# Altium PCB SPACER_1.PcbDoc
Units mm, origin at the board's own origin, x right, y up, seen from the top; angles counter-clockwise.
Board outline 22 x 22 mm, 2 copper layers (Top Layer, Bottom Layer), stack 1.571 mm thick; 1 components, 4 nets, 22 pads, 0 vias.
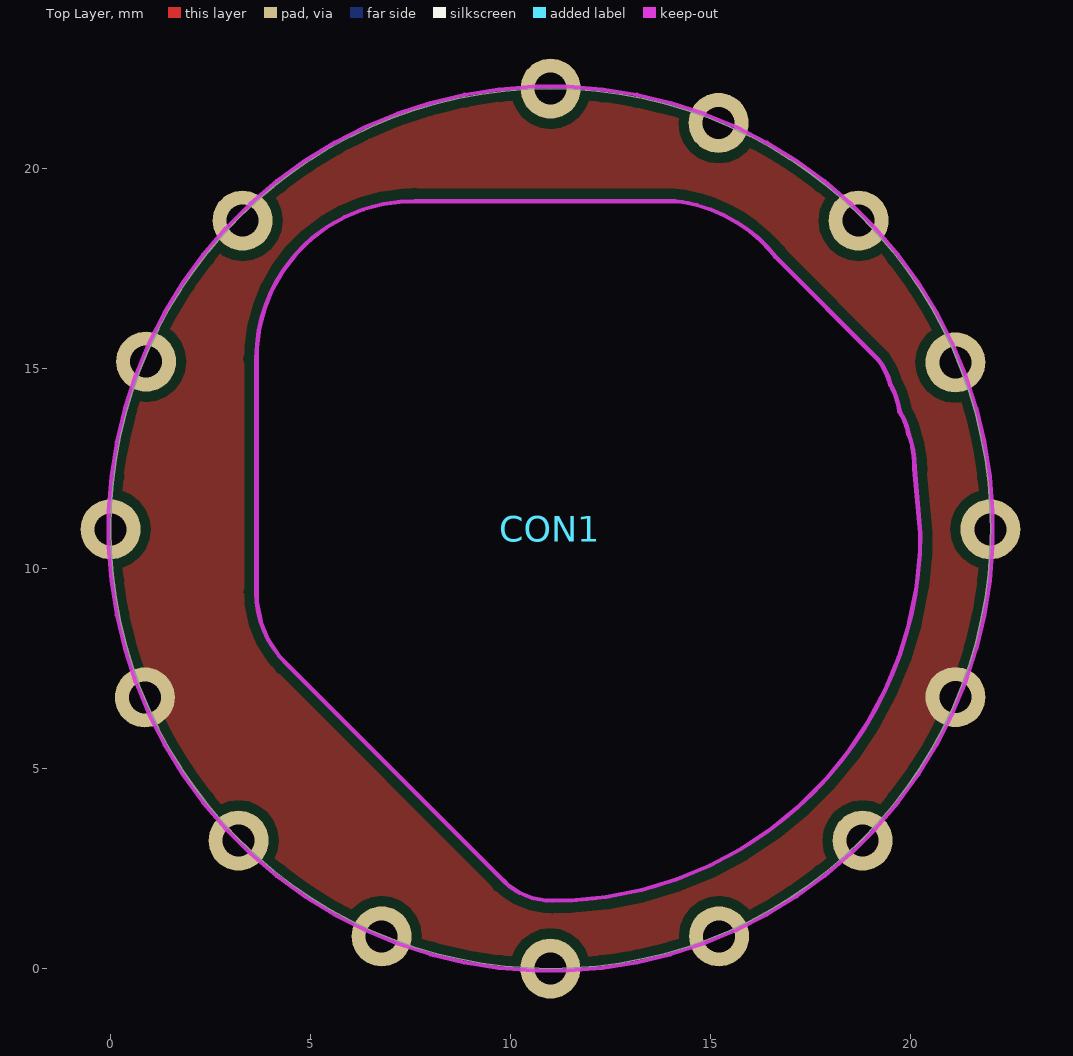
[diagram p0: Top Layer view]
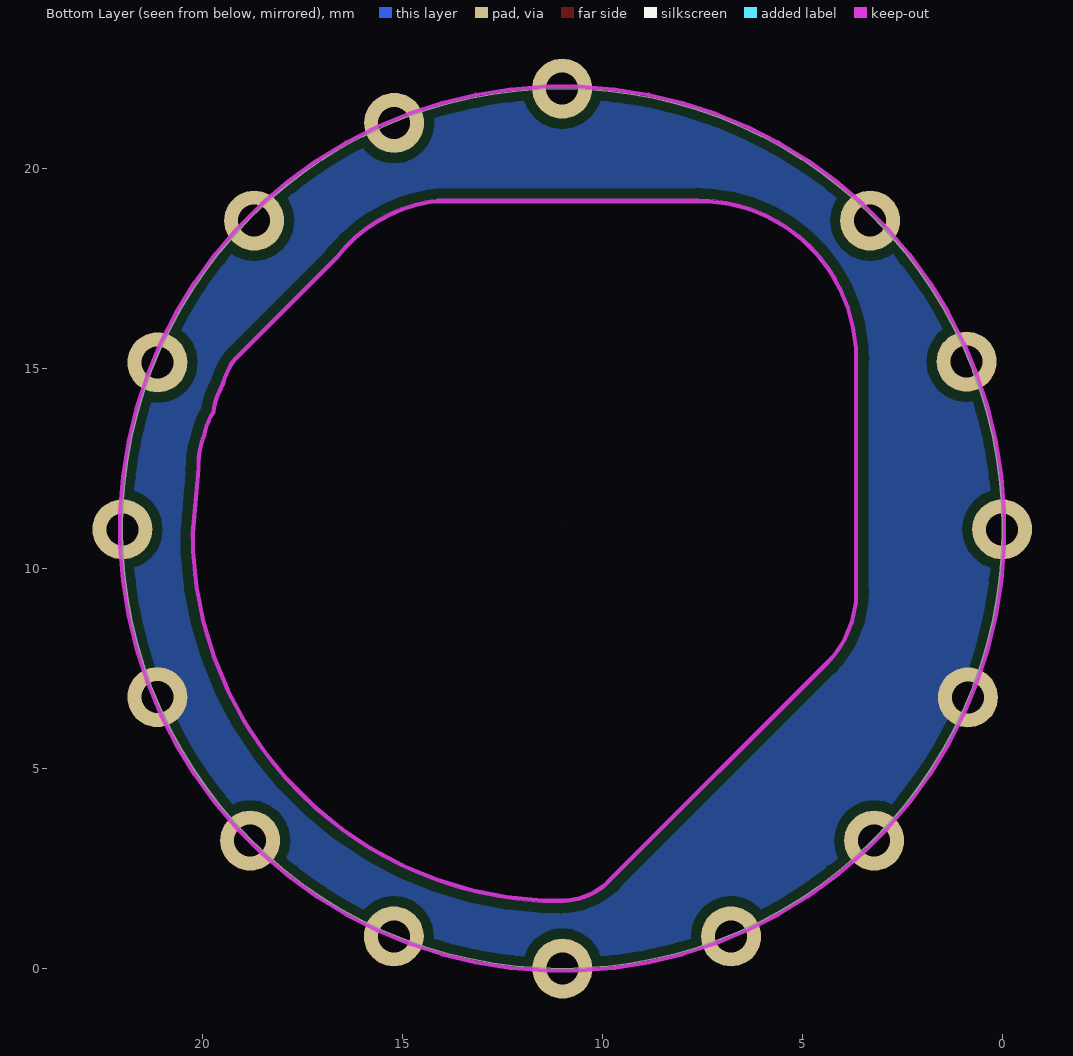
[diagram p1: Bottom Layer view, seen from below]

## Layer stack, top to bottom
Top Solder: solder mask 0.0102, Solder Resist, Dk 3.5
Top Layer: signal copper 0.0356
Dielectric 1: dielectric 1.5, FR-4, Dk 4.8
Bottom Layer: signal copper 0.0356
Bottom Solder: solder mask 0.0102, Solder Resist, Dk 3.5

## Board outline
11,0 cw(c11,11) 0,11 cw(c11,11) 11,22 cw(c11,11) 22,11 cw(c11,11)
cut-out: 11.041,1.65 cw(c11.04,3.414) 9.793,2.167 4.354,7.606 cw(c6.15,9.402) 3.61,9.402 3.61,15.256 cw(c7.585,15.258) 7.587,19.233 14.127,19.233 cw(c13.693,15.48) 16.654,17.826 19.216,15.264 cw(c17.756,14.153) 19.53,14.62 cw(c17.918,13.686) 19.765,13.931 cw(c18.536,13.113) 19.99,13.37 cw(c18.008,12.589) 20.137,12.51 20.28,10.889 cw(c11.041,10.889)
cut-out: 10.98,11.02

## Design rules (kind name [scope] priority, off if disabled: settings)
Clearance [All] p1: gap=0.254 ignorepadtopadclearanceinfootprint=FALSE except(0: Arc-Hole Track-Hole SMDPad-Hole THPad-Hole Via-Hole Fill-Hole Poly-Hole Region-Hole Text-Hole)
PolygonConnect [All] p1: connectstyle=Direct reliefconductorwidth=0.254 reliefentries=4 polygonreliefangle="90 Angle" airgapwidth=0.254
RoutingVias [All] p1: holewidth=0.711 width=1.27 viastyle="Through Hole" minholewidth=0.711 minwidth=1.27 maxholewidth=0.711 maxwidth=1.27
SolderMaskExpansion [All] p1: expansion=0.102
Width [All] p1: maxlimit=0.254 minlimit=0.254 preferedwidth=0.254
30 further rules are at their usual default settings.

## Components (designator, comment, footprint, x,y, rotation, side; value= is the part's Value field where it differs from the comment)
CON1 "Between PCB connection" SmartParks_Rhino 11,11 r0 top locked

## Footprints (in the part's own frame and the unit in brackets; to place one, negate y for a bottom-side part, rotate by r counter-clockwise, add the part's x,y. Pads: shape width x height; smd on the part's side, far side on the other; paste and mask are expansions set on the pad)
SmartParks_Rhino [mm]
  round 1.5 hole 0.8: 1(0,11) 2(4.199,10.142) 3(7.7,7.7) 4(10.119,4.153) 5(10.993,-0.017) 6(10.122,-4.212) 7(7.8,-7.8) 8(4.211,-10.193) 9(-0.007,-11) 10(-4.222,-10.197) 11(-7.8,-7.8) 12(-10.143,-4.22) 13(-11,-0.017) 14(-10.11,4.176) 15(-7.7,7.7)

## Part data
CON1: library part SmartParks_Rhino

## Free pads (board coordinates)
  round 0.25 hole 0.8 unplated: 16(4.04,1.5) 16(4.967,0.9) 16(5.047,21.097) 16(22.37,7.99) 16(22.64,9.1) 17(6.025,21.607) 18(6.997,22.027)

## Nets (pads, with @x,y where several pads share a name; then routed paths per layer and width w, separated by ;. In a path a pad name is that pad's centre, name@x,y a point inside that pad or via, vN(x,y) a via of type N, cw(c..) or ccw(c..) an arc to the next point about the centre after c; other vN are vias at no path point)
GND: CON1.6 CON1.12
VBAT: CON1.14
VGPS: CON1.13
VMCU: CON1.5
pads on no net: CON1.1 CON1.2 CON1.3 CON1.4 CON1.7 CON1.8 CON1.9 CON1.10 CON1.11 CON1.15

## Polygon pours and split planes (outlines as drawn)
GND on Top Layer "Top Layer-GND" (solid, pour order 0): 11,22 cw(c11,11.007) 21.993,11.007 cw(c10.986,11.007) 10.986,0 cw(c10.986,10.986) 0,10.986 0,11 cw(c10.97,11) 10.97,21.97
GND on Bottom Layer "Bottom Layer-GND" (solid, pour order 2): 11,22 cw(c11,10.95) 22.05,10.95 cw(c11.1,10.95) 11.1,0 10.9,0 cw(c10.9,10.95) -0.05,10.95 cw(c11,10.95)

## Keep-outs
Keep-Out Layer:
  lines w0.1: -0.05,10.564 cw(c0,10.568) -0.05,10.568 ; -0.05,10.564 -0.05,10.564 cw(c0,10.568) -0.05,10.568 ; -0.05,10.564 0.018,9.702 ; -0.05,10.568 -0.05,11 -0.05,11.432 ; -0.05,11.432 cw(c0,11.432) -0.05,11.436 ; -0.05,11.432 cw(c0,11.432) -0.05,11.436 -0.05,11.436 ; -0.05,11.436 0.018,12.298 ; 0.018,9.702 ccw(c0.068,9.706) 0.018,9.698 ; 0.018,9.702 ccw(c0.068,9.706) 0.018,9.698 ; 0.018,9.702 0.018,9.702 ; 0.018,12.298 cw(c0.068,12.294) 0.018,12.302 ; 0.018,12.298 cw(c0.068,12.294) 0.018,12.302 ; 0.018,12.298 0.018,12.298 ; 0.018,9.698 0.154,8.845 ; 0.018,12.302 0.154,13.155 ; 0.154,8.845 ccw(c0.203,8.852) 0.154,8.841 ; 0.154,8.845 ccw(c0.203,8.852) 0.154,8.841 ; 0.154,13.155 cw(c0.203,13.148) 0.154,13.159 ; 0.154,13.155 cw(c0.203,13.148) 0.154,13.159 ; 0.154,8.841 0.356,8 ; 0.154,13.159 0.356,14 ; 0.357,7.997 ccw(c0.405,8.012) 0.357,7.996 ; 0.357,7.997 cw(c0.405,8.012) 0.356,8 ; 0.357,7.997 0.357,7.996 ; 0.356,8 ccw(c0.405,8.012) 0.357,7.996 ; 0.356,14 cw(c0.405,13.988) 0.357,14.003 ; 0.356,14 cw(c0.405,13.988) 0.357,14.004 ; 0.357,14.003 cw(c0.405,13.988) 0.357,14.004 ; 0.357,14.003 0.357,14.004 ; 0.357,7.996 0.357,7.996 ; 0.357,7.996 0.624,7.174 ; 0.357,14.004 0.624,14.826 ; 0.357,14.004 0.357,14.004 ; 0.624,7.174 ccw(c0.672,7.19) 0.626,7.171 ; 0.624,7.174 ccw(c0.672,7.19) 0.624,7.174 ; 0.624,7.174 ccw(c0.672,7.19) 0.626,7.171 ; 0.624,7.174 0.624,7.174 ; 0.624,7.174 0.624,7.174 ; 0.624,14.826 cw(c0.672,14.81) 0.626,14.829 ; 0.624,14.826 ccw(c0.672,14.81) 0.624,14.826 ; 0.624,14.826 cw(c0.672,14.81) 0.626,14.829 ; 0.624,14.826 0.624,14.826 ; 0.624,14.826 0.624,14.826 ; 0.626,7.171 0.956,6.372 ; 0.626,14.829 0.956,15.628 ; 0.956,6.372 ccw(c1.003,6.391) 0.958,6.368 ; 0.956,6.372 ccw(c1.003,6.391) 0.958,6.368 ; 0.956,15.628 cw(c1.003,15.609) 0.958,15.632 ; 0.956,15.628 cw(c1.003,15.609) 0.958,15.632 ; 0.958,6.368 0.958,6.368 ; 0.958,6.368 1.35,5.599 ; 0.958,15.632 1.35,16.401 ; 0.958,15.632 0.958,15.632 ; 1.351,5.598 ccw(c1.395,5.621) 1.352,5.595 ; 1.35,5.599 ccw(c1.395,5.621) 1.352,5.595 ; 1.35,5.599 1.351,5.598 ; 1.351,16.402 cw(c1.395,16.379) 1.352,16.405 ; 1.35,16.401 cw(c1.395,16.379) 1.352,16.405 ; 1.35,16.401 1.351,16.402 ; 1.352,5.595 1.804,4.858 ; 1.352,16.405 1.804,17.142 ; 1.804,4.858 ccw(c1.847,4.884) 1.806,4.855 ; 1.804,4.858 ccw(c1.847,4.884) 1.806,4.855 ; 1.804,17.142 cw(c1.847,17.116) 1.806,17.145 ; 1.804,17.142 cw(c1.847,17.116) 1.806,17.145 ; 1.806,4.855 2.314,4.155 ; 1.806,17.145 2.314,17.845 ; 2.314,4.155 ccw(c2.355,4.185) 2.317,4.152 ; 2.314,4.155 ccw(c2.355,4.185) 2.317,4.152 ; 2.314,17.845 cw(c2.355,17.815) 2.317,17.848 ; 2.314,17.845 cw(c2.355,17.815) 2.317,17.848 ; 2.317,4.152 ccw(c2.355,4.185) 2.317,4.152 ; 2.317,4.152 2.317,4.152 ; 2.317,4.152 2.317,4.152 ; 2.317,17.848 cw(c2.355,17.815) 2.317,17.848 ; 2.317,17.848 2.317,17.848 ; 2.317,17.848 2.317,17.848 ; 2.317,4.152 2.878,3.495 ; 2.317,17.848 2.878,18.505 ; 2.878,3.495 ccw(c2.916,3.527) 2.878,3.495 ; 2.878,3.495 2.878,3.495 ; 2.878,18.505 cw(c2.916,18.473) 2.878,18.505 ; 2.878,18.505 2.878,18.505 ; 2.878,3.495 ccw(c2.916,3.527) 2.881,3.492 ; 2.878,3.495 2.878,3.495 ; 2.878,3.495 ccw(c2.916,3.527) 2.881,3.492 ; 2.878,18.505 cw(c2.916,18.473) 2.881,18.508 ; 2.878,18.505 2.878,18.505 ; 2.878,18.505 cw(c2.916,18.473) 2.881,18.508 ; 2.881,3.492 2.881,3.492 ; 2.881,3.492 3.492,2.881 ; 2.881,18.508 3.492,19.119 ; 2.881,18.508 2.881,18.508 ; 3.492,2.881 ccw(c3.527,2.916) 3.495,2.878 ; 3.492,2.881 ccw(c3.527,2.916) 3.495,2.878 ; 3.492,2.881 3.492,2.881 ; 3.492,19.119 cw(c3.527,19.084) 3.495,19.122 ; 3.492,19.119 cw(c3.527,19.084) 3.495,19.122 ; 3.492,19.119 3.492,19.119 ; 3.495,2.878 ccw(c3.527,2.916) 3.495,2.878 ; 3.495,2.878 4.152,2.317 ; 3.495,2.878 3.495,2.878 ; 3.495,2.878 3.495,2.878 ; 3.495,19.122 ccw(c3.527,19.084) 3.495,19.122 ; 3.495,19.122 4.152,19.683 ; 3.495,19.122 3.495,19.122 ; 3.495,19.122 3.495,19.122 ; 3.66,9.402 ccw(c3.61,9.402) 3.66,9.403 ; 3.66,9.402 ccw(c3.61,9.402) 3.66,9.403 ; 3.66,9.402 ccw(c3.61,9.402) 3.66,9.402 ; 3.66,9.403 3.66,15.256 ; 3.66,9.402 3.66,9.403 ; 3.66,9.402 3.66,9.157 3.756,8.676 3.943,8.223 4.216,7.815 4.389,7.641 ; 3.66,15.256 ccw(c3.61,15.256) 3.66,15.256 ; 3.66,15.256 ccw(c3.61,15.256) 3.66,15.256 ; 3.66,15.256 3.66,15.513 3.727,16.024 3.86,16.521 4.057,16.997 4.314,17.443 4.627,17.851 4.992,18.215 5.4,18.529 5.846,18.786 6.322,18.983 6.819,19.116 7.33,19.183 7.587,19.183 ; 4.152,2.317 ccw(c4.185,2.355) 4.155,2.314 ; 4.152,2.317 ccw(c4.185,2.355) 4.155,2.314 ; 4.152,2.317 ccw(c4.185,2.355) 4.152,2.317 ; 4.152,2.317 4.152,2.317 ; 4.152,2.317 4.152,2.317 ; 4.152,19.683 cw(c4.185,19.645) 4.155,19.686 ; 4.152,19.683 ccw(c4.185,19.645) 4.152,19.683 ; 4.152,19.683 cw(c4.185,19.645) 4.155,19.686 ; 4.152,19.683 4.152,19.683 ; 4.152,19.683 4.152,19.683 ; 4.155,2.314 4.855,1.806 ; 4.155,19.686 4.855,20.194 ; 4.389,7.641 cw(c4.354,7.606) 4.39,7.641 ; 4.389,7.641 4.39,7.641 ; 4.39,7.641 9.828,2.202 ; 4.855,1.806 ccw(c4.884,1.847) 4.858,1.804 ; 4.855,1.806 ccw(c4.884,1.847) 4.858,1.804 ; 4.855,20.194 cw(c4.884,20.153) 4.858,20.196 ; 4.855,20.194 cw(c4.884,20.153) 4.858,20.196 ; 4.858,1.804 5.595,1.352 ; 4.858,20.196 5.595,20.648 ; 5.595,1.352 ccw(c5.621,1.395) 5.598,1.351 5.599,1.35 ; 5.595,1.352 ccw(c5.621,1.395) 5.599,1.35 ; 5.595,20.648 cw(c5.621,20.605) 5.599,20.65 ; 5.595,20.648 cw(c5.621,20.605) 5.598,20.649 5.599,20.65 ; 5.599,1.35 6.368,0.958 ; 5.599,20.65 6.368,21.042 ; 6.368,0.958 ccw(c6.391,1.003) 6.372,0.956 ; 6.368,0.958 ccw(c6.391,1.003) 6.372,0.956 ; 6.368,0.958 6.368,0.958 ; 6.368,21.042 cw(c6.391,20.997) 6.372,21.044 ; 6.368,21.042 cw(c6.391,20.997) 6.372,21.044 ; 6.368,21.042 6.368,21.042 ; 6.372,0.956 7.171,0.626 ; 6.372,21.044 7.171,21.374 ; 7.171,0.626 ccw(c7.19,0.672) 7.174,0.624 ; 7.171,0.626 ccw(c7.19,0.672) 7.174,0.624 ; 7.171,21.374 cw(c7.19,21.328) 7.174,21.376 ; 7.171,21.374 cw(c7.19,21.328) 7.174,21.376 ; 7.174,0.624 ccw(c7.19,0.672) 7.174,0.624 ; 7.174,0.624 7.996,0.357 ; 7.174,0.624 7.174,0.624 ; 7.174,0.624 7.174,0.624 ; 7.174,21.376 ccw(c7.19,21.328) 7.174,21.376 ; 7.174,21.376 7.996,21.643 ; 7.174,21.376 7.174,21.376 ; 7.174,21.376 7.174,21.376 ; 7.587,19.183 ccw(c7.587,19.233) 7.587,19.183 ; 7.587,19.183 ccw(c7.587,19.233) 7.588,19.183 ; 7.587,19.183 ccw(c7.587,19.233) 7.588,19.183 ; 7.587,19.183 7.588,19.183 ; 7.588,19.183 14.124,19.183 14.303,19.162 14.661,19.085 15.01,18.972 15.346,18.826 15.666,18.648 15.967,18.439 16.246,18.202 16.501,17.939 16.614,17.795 ; 7.996,0.357 ccw(c8.012,0.405) 7.997,0.357 ; 7.996,0.357 7.996,0.357 ; 7.996,21.643 cw(c8.012,21.595) 7.997,21.643 ; 7.996,21.643 7.996,21.643 ; 7.996,0.357 ccw(c8.012,0.405) 8,0.356 ; 7.997,0.357 ccw(c8.012,0.405) 8,0.356 ; 7.996,0.357 7.997,0.357 ; 7.996,21.643 cw(c8.012,21.595) 8,21.644 ; 7.997,21.643 cw(c8.012,21.595) 8,21.644 ; 7.996,21.643 7.997,21.643 ; 8,0.356 8.841,0.154 ; 8,21.644 8.841,21.846 ; 8.841,0.154 ccw(c8.852,0.203) 8.845,0.154 ; 8.841,0.154 ccw(c8.852,0.203) 8.845,0.154 ; 8.841,21.846 cw(c8.852,21.797) 8.845,21.846 ; 8.841,21.846 cw(c8.852,21.797) 8.845,21.846 ; 8.845,0.154 9.698,0.018 ; 8.845,21.846 9.698,21.982 ; 9.698,0.018 ccw(c9.706,0.068) 9.702,0.018 ; 9.698,0.018 ccw(c9.706,0.068) 9.702,0.018 ; 9.698,21.982 cw(c9.706,21.932) 9.702,21.982 ; 9.698,21.982 cw(c9.706,21.932) 9.702,21.982 ; 9.702,0.018 10.564,-0.05 ; 9.702,0.018 9.702,0.018 ; 9.702,21.982 10.564,22.05 ; 9.702,21.982 9.702,21.982 ; 9.829,2.202 cw(c9.793,2.167) 9.83,2.201 ; 9.828,2.202 cw(c9.793,2.167) 9.83,2.201 ; 9.828,2.202 9.829,2.202 ; 9.83,2.201 9.948,2.083 10.229,1.895 10.541,1.766 10.872,1.7 11.041,1.7 ; 10.564,-0.05 ccw(c10.568,0) 10.568,-0.05 ; 10.564,-0.05 ccw(c10.568,0) 10.568,-0.05 ; 10.564,-0.05 10.564,-0.05 ; 10.564,22.05 cw(c10.568,22) 10.568,22.05 ; 10.564,22.05 cw(c10.568,22) 10.568,22.05 ; 10.564,22.05 10.564,22.05 ; 10.568,-0.05 11.432,-0.05 ; 10.568,22.05 11.432,22.05 ; 11.041,1.7 ccw(c11.041,1.65) 11.041,1.7 ; 11.041,1.7 ccw(c11.041,1.65) 11.041,1.7 ; 11.041,1.7 11.492,1.7 12.391,1.789 13.276,1.965 14.14,2.227 14.974,2.572 15.771,2.998 16.521,3.5 17.219,4.072 17.858,4.711 18.43,5.409 18.932,6.159 19.358,6.956 19.703,7.79 19.965,8.654 20.141,9.539 20.23,10.438 20.23,10.887 20.087,12.505 ; 11.432,-0.05 ccw(c11.432,0) 11.436,-0.05 ; 11.432,-0.05 ccw(c11.432,0) 11.436,-0.05 ; 11.432,22.05 cw(c11.432,22) 11.436,22.05 ; 11.432,22.05 cw(c11.432,22) 11.436,22.05 ; 11.436,-0.05 12.298,0.018 ; 11.436,-0.05 11.436,-0.05 ; 11.436,22.05 12.298,21.982 ; 11.436,22.05 11.436,22.05 ; 12.298,0.018 ccw(c12.294,0.068) 12.302,0.018 ; 12.298,0.018 12.298,0.018 ccw(c12.294,0.068) 12.302,0.018 ; 12.298,21.982 cw(c12.294,21.932) 12.302,21.982 ; 12.298,21.982 12.298,21.982 cw(c12.294,21.932) 12.302,21.982 ; 12.302,0.018 13.155,0.154 ; 12.302,21.982 13.155,21.846 ; 13.155,0.154 ccw(c13.148,0.203) 13.159,0.154 ; 13.155,0.154 ccw(c13.148,0.203) 13.159,0.154 ; 13.155,21.846 cw(c13.148,21.797) 13.159,21.846 ; 13.155,21.846 cw(c13.148,21.797) 13.159,21.846 ; 13.159,0.154 14,0.356 ; 13.159,21.846 14,21.644 ; 14,0.356 ccw(c13.988,0.405) 14.003,0.357 ; 14,0.356 ccw(c13.988,0.405) 14.004,0.357 ; 14,21.644 cw(c13.988,21.595) 14.003,21.643 ; 14,21.644 cw(c13.988,21.595) 14.004,21.643 ; 14.003,0.357 ccw(c13.988,0.405) 14.004,0.357 ; 14.004,0.357 14.826,0.624 ; 14.004,0.357 14.004,0.357 ; 14.003,0.357 14.004,0.357 ; 14.004,21.643 ccw(c13.988,21.595) 14.003,21.643 ; 14.004,21.643 14.826,21.376 ; 14.004,21.643 14.004,21.643 ; 14.003,21.643 14.004,21.643 ; 14.826,0.624 ccw(c14.81,0.672) 14.829,0.626 ; 14.826,0.624 ccw(c14.81,0.672) 14.826,0.624 ; 14.826,0.624 ccw(c14.81,0.672) 14.829,0.626 ; 14.826,0.624 14.826,0.624 ; 14.826,0.624 14.826,0.624 ; 14.826,21.376 cw(c14.81,21.328) 14.829,21.374 ; 14.826,21.376 ccw(c14.81,21.328) 14.826,21.376 ; 14.826,21.376 cw(c14.81,21.328) 14.829,21.374 ; 14.826,21.376 14.826,21.376 ; 14.826,21.376 14.826,21.376 ; 14.829,0.626 15.628,0.956 ; 14.829,21.374 15.628,21.044 ; 15.628,0.956 ccw(c15.609,1.003) 15.632,0.958 ; 15.628,0.956 ccw(c15.609,1.003) 15.632,0.958 ; 15.628,21.044 cw(c15.609,20.997) 15.632,21.042 ; 15.628,21.044 cw(c15.609,20.997) 15.632,21.042 ; 15.632,0.958 16.401,1.35 ; 15.632,0.958 15.632,0.958 ; 15.632,21.042 16.401,20.65 ; 15.632,21.042 15.632,21.042 ; 16.402,1.351 ccw(c16.379,1.395) 16.405,1.352 ; 16.401,1.35 ccw(c16.379,1.395) 16.405,1.352 ; 16.401,1.35 16.402,1.351 ; 16.402,20.649 cw(c16.379,20.605) 16.405,20.648 ; 16.401,20.65 cw(c16.379,20.605) 16.405,20.648 ; 16.401,20.65 16.402,20.649 ; 16.405,1.352 17.142,1.804 ; 16.405,20.648 17.142,20.196 ; 16.614,17.795 ccw(c16.654,17.826) 16.619,17.79 ; 16.614,17.795 ccw(c16.654,17.826) 16.618,17.791 16.619,17.79 ; 16.614,17.795 16.614,17.795 ; 16.614,17.795 16.615,17.795 ; 16.614,17.795 ccw(c16.654,17.826) 16.615,17.795 ; 16.615,17.795 ccw(c16.654,17.826) 16.619,17.79 ; 16.619,17.79 19.178,15.231 19.229,15.164 19.321,15.014 19.398,14.857 19.459,14.692 19.482,14.608 ; 17.142,1.804 ccw(c17.116,1.847) 17.145,1.806 ; 17.142,1.804 ccw(c17.116,1.847) 17.145,1.806 ; 17.142,20.196 cw(c17.116,20.153) 17.145,20.194 ; 17.142,20.196 cw(c17.116,20.153) 17.145,20.194 ; 17.145,1.806 17.845,2.314 ; 17.145,20.194 17.845,19.686 ; 17.845,2.314 ccw(c17.815,2.355) 17.848,2.317 ; 17.845,2.314 ccw(c17.815,2.355) 17.848,2.317 ; 17.845,19.686 cw(c17.815,19.645) 17.848,19.683 ; 17.845,19.686 cw(c17.815,19.645) 17.848,19.683 ; 17.848,2.317 ccw(c17.815,2.355) 17.848,2.317 ; 17.848,2.317 18.505,2.878 ; 17.848,2.317 17.848,2.317 ; 17.848,2.317 17.848,2.317 ; 17.848,19.683 ccw(c17.815,19.645) 17.848,19.683 ; 17.848,19.683 18.505,19.122 ; 17.848,19.683 17.848,19.683 ; 17.848,19.683 17.848,19.683 ; 18.505,2.878 ccw(c18.473,2.916) 18.508,2.881 18.508,2.881 ; 18.505,2.878 ccw(c18.473,2.916) 18.505,2.878 ; 18.505,2.878 ccw(c18.473,2.916) 18.508,2.881 ; 18.505,2.878 18.505,2.878 ; 18.505,2.878 18.505,2.878 ; 18.505,19.122 cw(c18.473,19.084) 18.508,19.119 ; 18.505,19.122 ccw(c18.473,19.084) 18.505,19.122 ; 18.505,19.122 cw(c18.473,19.084) 18.508,19.119 18.508,19.119 ; 18.505,19.122 18.505,19.122 ; 18.505,19.122 18.505,19.122 ; 18.508,2.881 19.119,3.492 ; 18.508,19.119 19.119,18.508 ; 19.119,3.492 ccw(c19.084,3.527) 19.122,3.495 ; 19.119,3.492 19.119,3.492 ccw(c19.084,3.527) 19.122,3.495 ; 19.119,18.508 cw(c19.084,18.473) 19.122,18.505 ; 19.119,18.508 19.119,18.508 cw(c19.084,18.473) 19.122,18.505 ; 19.122,3.495 ccw(c19.084,3.527) 19.122,3.495 ; 19.122,3.495 19.122,3.495 ; 19.122,3.495 19.683,4.152 ; 19.122,3.495 19.122,3.495 ; 19.122,18.505 ccw(c19.084,18.473) 19.122,18.505 ; 19.122,18.505 19.122,18.505 ; 19.122,18.505 19.122,18.505 ; 19.122,18.505 19.683,17.848 ; 19.482,14.608 ccw(c19.53,14.62) 19.487,14.595 19.487,14.595 ; 19.482,14.608 19.482,14.607 ccw(c19.53,14.62) 19.487,14.595 ; 19.487,14.595 19.531,14.518 19.605,14.355 19.663,14.187 19.704,14.013 19.715,13.925 ; 19.683,4.152 ccw(c19.645,4.185) 19.686,4.155 ; 19.683,4.152 ccw(c19.645,4.185) 19.686,4.155 ; 19.683,4.152 ccw(c19.645,4.185) 19.683,4.152 ; 19.683,4.152 19.683,4.152 ; 19.683,4.152 19.683,4.152 ; 19.683,17.848 cw(c19.645,17.815) 19.686,17.845 ; 19.683,17.848 ccw(c19.645,17.815) 19.683,17.848 ; 19.683,17.848 cw(c19.645,17.815) 19.686,17.845 ; 19.683,17.848 19.683,17.848 ; 19.683,17.848 19.683,17.848 ; 19.686,4.155 20.194,4.855 ; 19.686,17.845 20.194,17.145 ; 19.715,13.925 ccw(c19.765,13.931) 19.723,13.904 ; 19.715,13.925 ccw(c19.765,13.931) 19.723,13.904 ; 19.715,13.925 19.715,13.925 ; 19.723,13.904 19.764,13.842 19.833,13.712 19.887,13.575 19.928,13.434 19.941,13.361 ; 19.941,13.361 ccw(c19.99,13.37) 19.943,13.352 ; 19.941,13.361 ccw(c19.99,13.37) 19.941,13.361 ; 19.941,13.361 ccw(c19.99,13.37) 19.943,13.352 ; 19.941,13.361 19.941,13.361 ; 19.941,13.361 19.941,13.361 ; 19.943,13.352 19.983,13.252 20.04,13.045 20.077,12.834 20.091,12.619 20.087,12.512 ; 20.087,12.505 cw(c20.137,12.51) 20.087,12.512 ; 20.087,12.505 cw(c20.137,12.51) 20.087,12.512 ; 20.087,12.505 20.087,12.506 cw(c20.137,12.51) 20.087,12.512 ; 20.087,12.512 20.087,12.512 ; 20.194,4.855 ccw(c20.153,4.884) 20.196,4.858 ; 20.194,4.855 ccw(c20.153,4.884) 20.196,4.858 ; 20.194,17.145 cw(c20.153,17.116) 20.196,17.142 ; 20.194,17.145 cw(c20.153,17.116) 20.196,17.142 ; 20.196,4.858 20.648,5.595 ; 20.196,17.142 20.648,16.405 ; 20.648,5.595 ccw(c20.605,5.621) 20.65,5.599 ; 20.648,5.595 ccw(c20.605,5.621) 20.649,5.598 ; 20.648,16.405 cw(c20.605,16.379) 20.65,16.401 ; 20.648,16.405 cw(c20.605,16.379) 20.649,16.402 ; 20.65,5.599 21.042,6.368 ; 20.649,5.598 20.65,5.599 ; 20.649,16.402 20.65,16.401 ; 20.65,16.401 21.042,15.632 ; 21.042,6.368 ccw(c20.997,6.391) 21.044,6.372 ; 21.042,6.368 21.042,6.368 ccw(c20.997,6.391) 21.044,6.372 ; 21.042,15.632 cw(c20.997,15.609) 21.044,15.628 ; 21.042,15.632 21.042,15.632 cw(c20.997,15.609) 21.044,15.628 ; 21.044,6.372 21.374,7.171 ; 21.044,15.628 21.374,14.829 ; 21.374,7.171 ccw(c21.328,7.19) 21.376,7.174 ; 21.374,7.171 ccw(c21.328,7.19) 21.376,7.174 ; 21.374,14.829 cw(c21.328,14.81) 21.376,14.826 ; 21.374,14.829 cw(c21.328,14.81) 21.376,14.826 ; 21.376,7.174 ccw(c21.328,7.19) 21.376,7.174 ; 21.376,7.174 21.643,7.996 ; 21.376,7.174 21.376,7.174 ; 21.376,7.174 21.376,7.174 ; 21.376,14.826 ccw(c21.328,14.81) 21.376,14.826 ; 21.376,14.826 21.376,14.826 ; 21.376,14.826 21.376,14.826 ; 21.376,14.826 21.643,14.004 ; 21.643,7.996 ccw(c21.595,8.012) 21.644,8 ; 21.643,7.997 ccw(c21.595,8.012) 21.644,8 ; 21.643,7.996 ccw(c21.595,8.012) 21.643,7.997 ; 21.643,7.996 21.643,7.997 ; 21.643,7.996 21.643,7.996 ; 21.643,14.004 cw(c21.595,13.988) 21.644,14 ; 21.643,14.003 ccw(c21.595,13.988) 21.643,14.004 ; 21.643,14.003 cw(c21.595,13.988) 21.644,14 ; 21.643,14.004 21.643,14.004 ; 21.643,14.004 21.643,14.003 ; 21.644,8 21.846,8.841 ; 21.644,14 21.846,13.159 ; 21.846,8.841 ccw(c21.797,8.852) 21.846,8.845 ; 21.846,8.841 ccw(c21.797,8.852) 21.846,8.845 ; 21.846,13.159 cw(c21.797,13.148) 21.846,13.155 ; 21.846,13.159 cw(c21.797,13.148) 21.846,13.155 ; 21.846,8.845 21.982,9.698 ; 21.846,13.155 21.982,12.302 ; 21.982,9.698 ccw(c21.932,9.706) 21.982,9.702 ; 21.982,9.698 ccw(c21.932,9.706) 21.982,9.702 ; 21.982,9.702 22.05,10.564 ; 21.982,9.702 21.982,9.702 ; 21.982,12.298 ccw(c21.932,12.294) 21.982,12.302 ; 21.982,12.298 ccw(c21.932,12.294) 21.982,12.302 ; 21.982,12.298 21.982,12.298 ; 21.982,12.298 22.05,11.436 ; 22.05,10.564 ccw(c22,10.568) 22.05,10.568 ; 22.05,10.564 22.05,10.564 ccw(c22,10.568) 22.05,10.568 ; 22.05,10.568 22.05,11 22.05,11.432 ; 22.05,11.432 ccw(c22,11.432) 22.05,11.436 ; 22.05,11.432 ccw(c22,11.432) 22.05,11.436 22.05,11.436

## Silkscreen, mask and mechanical layers (free items; w line width, h text height)
Route Tool Path:
  lines w2: 3.117,1.976 cw(c11.007,11.017) 3.873,20.666 ; 5.706,0.251 ccw(c11.007,11.017) 22.301,6.96 ; 7.99,22.632 cw(c11.007,11.017) 23.007,11.017 cw(c11.007,11.017) 22.97,10.074